# Altium PCB PCB.PcbDoc
Units mm, origin at the board's own origin, x right, y up, seen from the top; angles counter-clockwise.
Board outline 51.94 x 30.86 mm, 2 copper layers (Top Layer, Bottom Layer); 28 components, 49 nets, 159 pads, 29 vias.
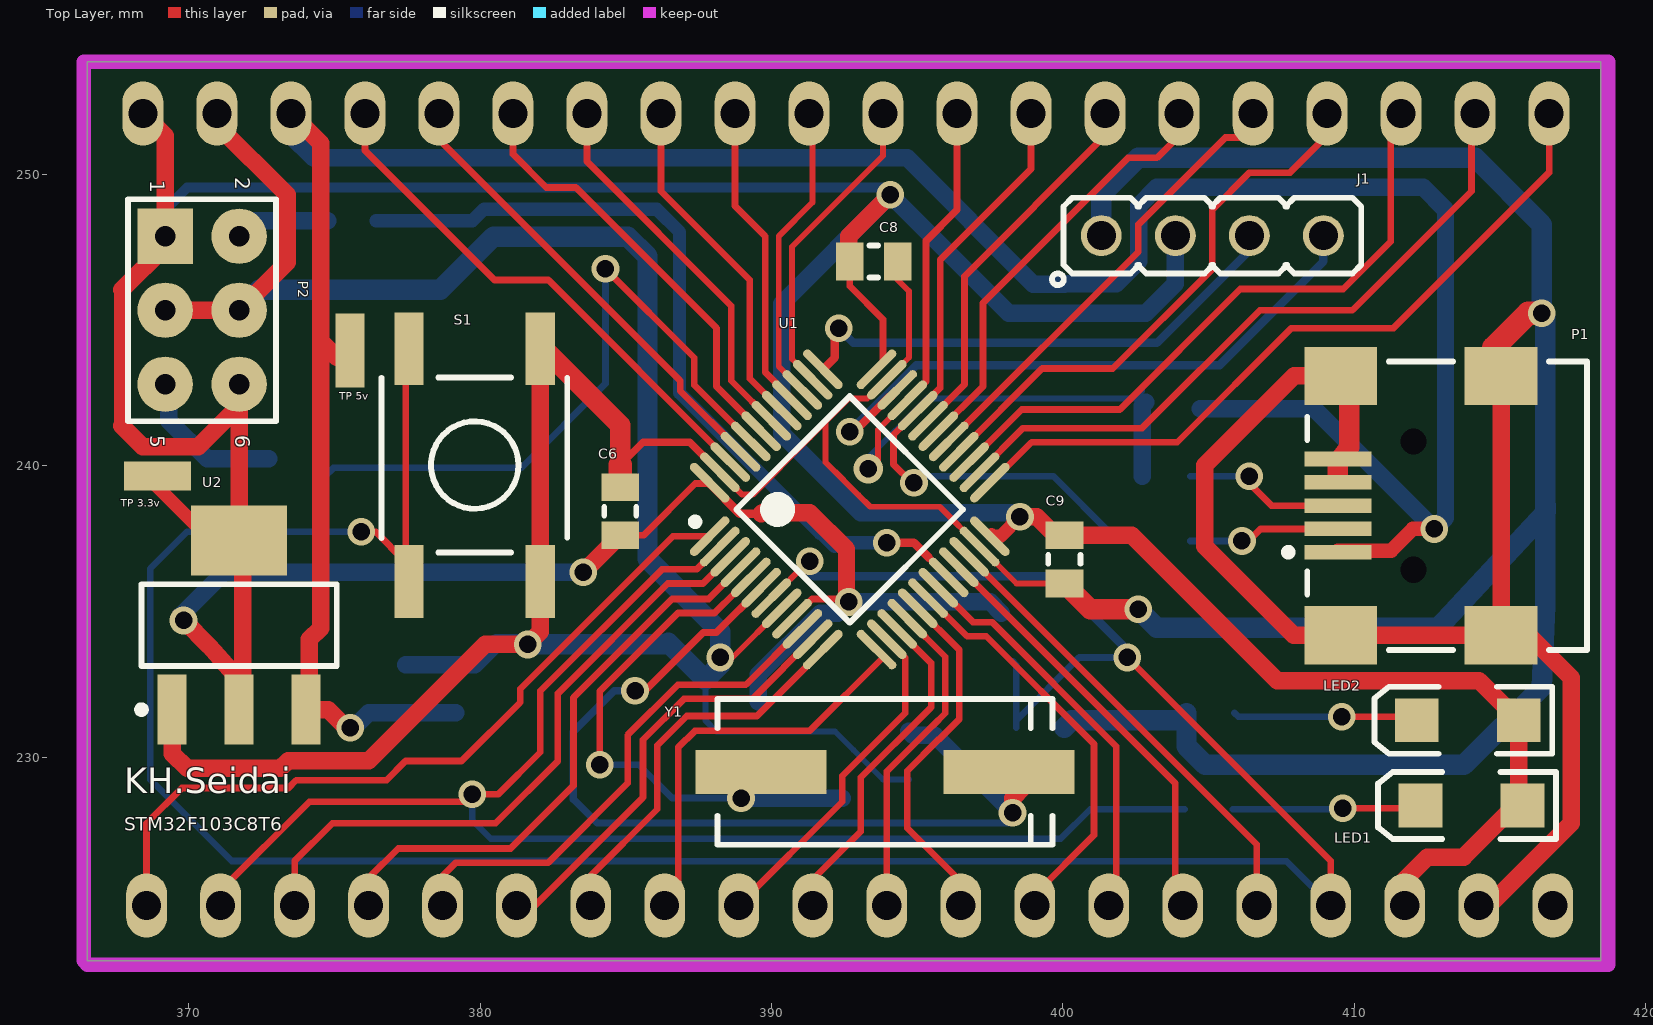
[diagram p0: Top Layer view]
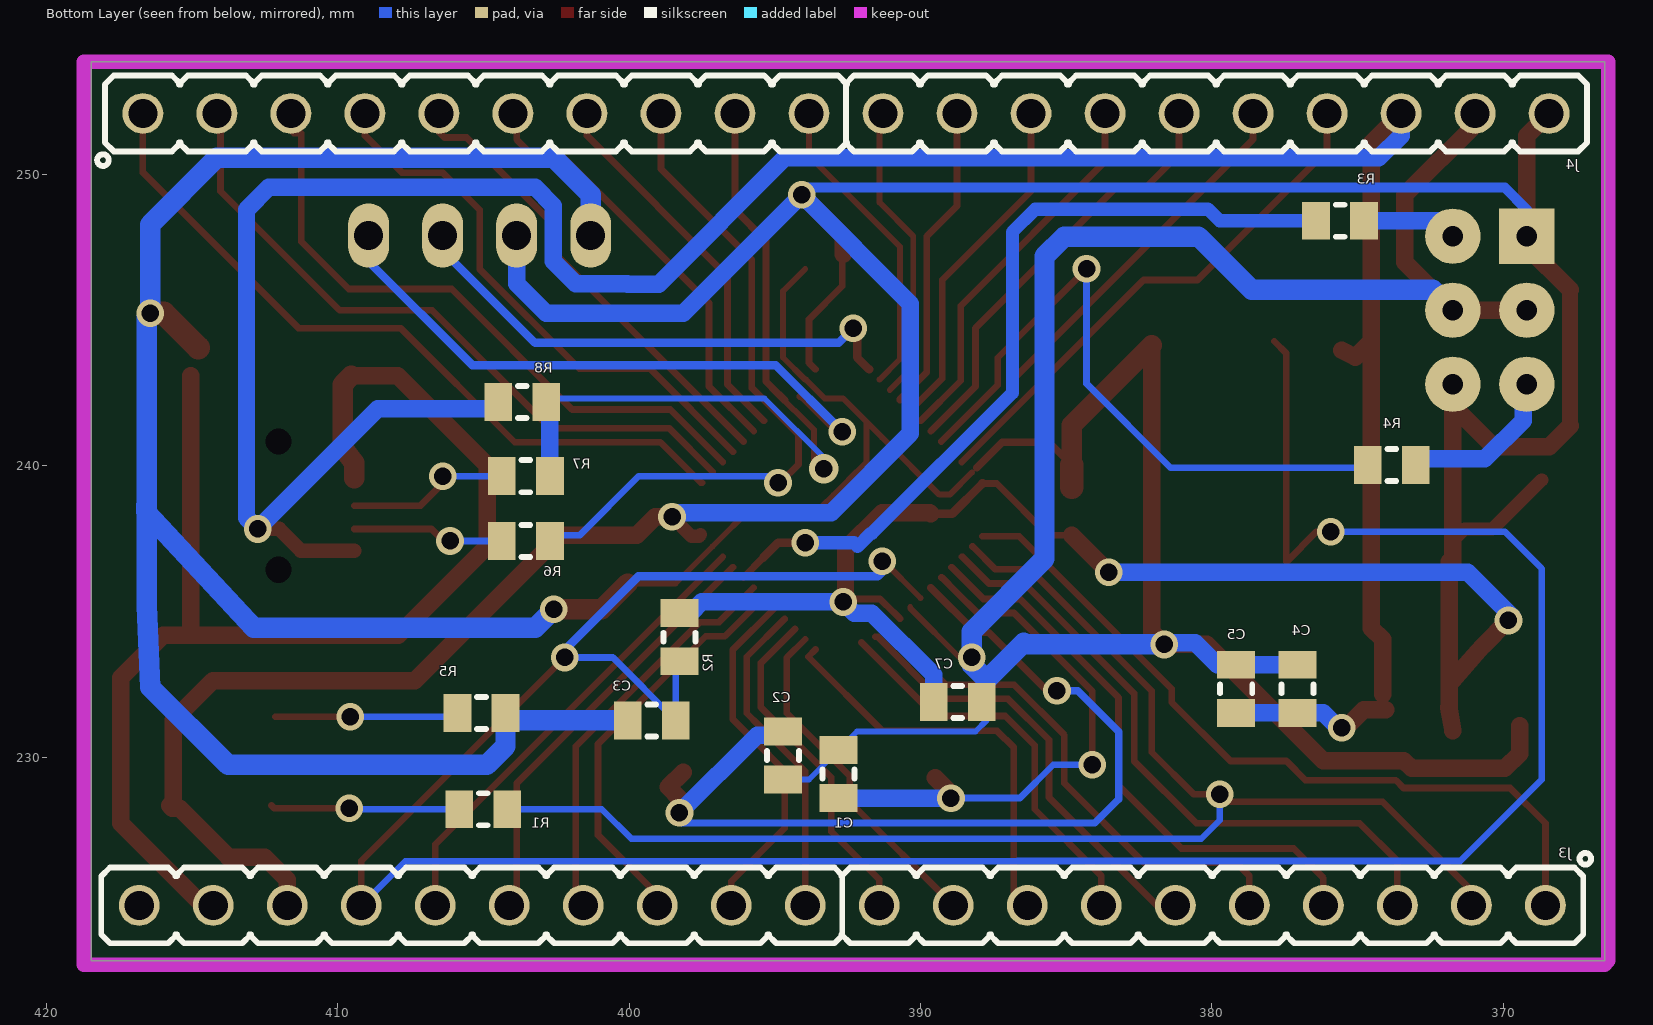
[diagram p1: Bottom Layer view, seen from below]

## Layer stack, top to bottom
Top Solder: solder mask 0.0102, Solder Resist, Dk 3.5
Top Layer: signal copper 0.0356
Dielectric 1: dielectric 0.32, FR-4, Dk 4.8
Bottom Layer: signal copper 0.0356
Bottom Solder: solder mask 0.0102, Solder Resist, Dk 3.5

## Board outline
366.522,223.012 418.465,223.012 418.465,253.873 366.522,253.873

## Design rules (kind name [scope] priority, off if disabled: settings)
Clearance Clearance_1 [InComponent('U1')] p1: gap=0.17 ignorepadtopadclearanceinfootprint=FALSE
Clearance [All] p2: gap=0.254 ignorepadtopadclearanceinfootprint=FALSE
PolygonConnect [All] p1: connectstyle=Relief reliefconductorwidth=0.254 reliefentries=4 polygonreliefangle="90 Angle" airgapwidth=0.254
RoutingVias [All] p1: holewidth=0.9 width=1.27 viastyle="Through Hole" minholewidth=0.6 minwidth=0.6 maxholewidth=1.5 maxwidth=2
SolderMaskExpansion [All] p1: expansion=0.102
UnRoutedNet [All] p1: checkbadconnections=TRUE
Width Width_1 [(InNet('3.3') OR InNet('5v') OR InNet('GND'))] p1: maxlimit=0.8 minlimit=0.1 preferedwidth=0.8
Width [All] p2: maxlimit=0.6 minlimit=0.1 preferedwidth=0.45
29 further rules are at their usual default settings.

## Components (designator, comment, footprint, x,y, rotation, side; value= is the part's Value field where it differs from the comment)
C1 "20pf" SMD_CAP_0805 392.811,230.251 r270 bottom
C2 "20pf" SMD_CAP_0805 394.716,229.236 r90 bottom
C3 "1uF" SMD_CAP_0805 398.4,231.267 r0 bottom
C4 "1uF" SMD_CAP_0805 377.063,231.522 r90 bottom
C5 "100nf" SMD_CAP_0805 379.167,231.522 r90 bottom
C6 "10uF" SMD_CAP_0805 384.81,237.618 r90 top
C7 "100nF" SMD_CAP_0805 389.549,231.902 r180 bottom
C8 "100nF" SMD_CAP_0805 392.684,247.015 r0 top
C9 "100nF" SMD_CAP_0805 400.05,237.616 r270 top
J1 "HDR1X4" HDR_M_1X4 405.13,247.904 r0 top value=HDRM4
J3 "HDR1X20" HDR_M_1X20 392.684,224.917 r0 bottom locked value=HDRM20
J4 "HDR1X20" HDR_M_1X20 392.557,252.095 r180 bottom locked value=HDRM20
LED1 "white" "LED SMD 1206" 414.02,228.346 r180 top
LED2 "Green" "LED SMD 1206" 413.893,231.272 r180 top
P1 "USB mini" "SMD_Mini USB Connector" 417.286,238.638 r0 top locked
P2 "Header 3X2" HDR2X3 369.189,247.883 r270 top
R1 "10K" "RES 0805 (2012X06L)" 405.83,228.219 r180 bottom
R2 "10K" "RES 0805 (2012X06L)" 398.272,233.3 r90 bottom
R3 "100K" "RES 0805 (2012X06L)" 374.777,248.412 r0 bottom
R4 "100K" "RES 0805 (2012X06L)" 374.65,240.03 r180 bottom
R5 "10K" "RES 0805 (2012X06L)" 405.892,231.521 r180 bottom
R6 "20ohm" "RES 0805 (2012X06L)" 402.718,237.424 r0 bottom
R7 "20ohm" "RES 0805 (2012X06L)" 402.717,239.649 r0 bottom
R8 "2.2K" "RES 0805 (2012X06L)" 404.494,242.189 r180 bottom
S1 "Switch PB" SW-PB 379.815,240.03 r270 top
U1 "STM32F103C8T6" LQFP48_N 392.684,238.506 r45 top locked
U2 "LM1117IMP-x.x" MP04A_N 371.729,234.536 r90 top
Y1 "8MHZ" "Crystal SMD" 394.462,229.496 r180 top

## Footprints (in the part's own frame and the unit in brackets; to place one, negate y for a bottom-side part, rotate by r counter-clockwise, add the part's x,y. Pads: shape width x height; smd on the part's side, far side on the other; paste and mask are expansions set on the pad)
"Crystal SMD" [mm]
  rect 4.5x1.5 smd: 1(-3.683,0) 2(4.817,0)
  silkscreen extent -5.18,-2.5 6.32,2.5, body extent -5.64,-2.25 6.66,2.25, height 5.18
HDR2X3 [mm] "Connector; Header; 3x2 Position"
  rect 1.9x1.9 hole 0.7: 1(0,0)
  round 1.9 hole 0.7: 2(0,2.54) 3(2.54,0) 4(2.54,2.54) 5(5.08,0) 6(5.08,2.54)
  silkscreen extent -1.27,-1.27 6.35,3.81
HDR_M_1X4 [mm] "Connector; Header; 4 Position"
  round 1.4 / inner round 1.4 / far side oval 1.4x2.2 hole 1 mask+0.1: 1(-3.81,0) 2(-1.27,0) 3(1.27,0) 4(3.81,0)
  silkscreen extent -5.5,-1.7 5.11,1.3, body extent -5.08,-1.27 5.08,1.27, height 8.54
HDR_M_1X20 [mm] "Connector; Header; 20 Position"
  round 1.4 / inner round 1.4 / far side oval 1.4x2.2 hole 1 mask+0.1: 1(-24.13,0) 2(-21.59,0) 3(-19.05,0) 4(-16.51,0) 5(-13.97,0) 6(-11.43,0) 7(-8.89,0) 8(-6.35,0) 9(-3.81,0) 10(-1.27,0) 11(1.27,0) 12(3.81,0) 13(6.35,0) 14(8.89,0) 15(11.43,0) 16(13.97,0) 17(16.51,0) 18(19.05,0) 19(21.59,0) 20(24.13,0)
  silkscreen extent -25.7,-1.8 25.43,1.3, body extent -25.4,-1.3 25.4,1.19, height 8.54
"LED SMD 1206" [mm]
  rect 1.5x1.5 smd: 1(-1.75,0) 2(1.75,0)
  silkscreen extent -2.9,-1.15 3.2,1.15, body extent -1.65,-0.76 1.65,0.69, height 1.36
LQFP48_N [mm] "Thin QFP, 48-Leads, Body 7x7mm, Pitch 0.5mm, IPC Medium Density"
  oval 1.8x0.3 smd: 1(-4.05,2.75) 2(-4.05,2.25) 3(-4.05,1.75) 4(-4.05,1.25) 5(-4.05,0.75) 6(-4.05,0.25) 7(-4.05,-0.25) 8(-4.05,-0.75) 9(-4.05,-1.25) 10(-4.05,-1.75) 11(-4.05,-2.25) 12(-4.05,-2.75) 25(4.05,-2.75) 26(4.05,-2.25) 27(4.05,-1.75) 28(4.05,-1.25) 29(4.05,-0.75) 30(4.05,-0.25) 31(4.05,0.25) 32(4.05,0.75) 33(4.05,1.25) 34(4.05,1.75) 35(4.05,2.25) 36(4.05,2.75)
  oval 0.3x1.8 smd: 13(-2.75,-4.05) 14(-2.25,-4.05) 15(-1.75,-4.05) 16(-1.25,-4.05) 17(-0.75,-4.05) 18(-0.25,-4.05) 19(0.25,-4.05) 20(0.75,-4.05) 21(1.25,-4.05) 22(1.75,-4.05) 23(2.25,-4.05) 24(2.75,-4.05) 37(2.75,4.05) 38(2.25,4.05) 39(1.75,4.05) 40(1.25,4.05) 41(0.75,4.05) 42(0.25,4.05) 43(-0.25,4.05) 44(-0.75,4.05) 45(-1.25,4.05) 46(-1.75,4.05) 47(-2.25,4.05) 48(-2.75,4.05)
  silkscreen extent -4.17,-2.75 2.75,3.57, body extent -3.5,-3.5 3.5,3.5, height 1.6
MP04A_N [mm] "SOT223, 4-Leads, Body 6.5x3.5mm, Pitch 2.3mm, Lead Span 7mm, IPC Medium Density"
  rect 2.4x1 smd: 1(-2.9,2.3) 2(-2.9,0) 3(-2.9,-2.3)
  rect 2.4x3.3 smd: 4(2.9,0)
  silkscreen extent -3.02,-3.35 1.4,3.47, body extent -3.49,-3.24 3.49,3.24, height 1.64
"RES 0805 (2012X06L)" [mm] "Chip Resistor, 2-Leads, Body 2.0x1.3mm, IPC High Density _ (0.100 W)"
  rect 0.95x1.3 smd: 1(0,0) 2(1.65,0)
  silkscreen extent 0.67,-0.55 0.98,0.55, body extent -0.19,-0.63 1.84,0.64, height 0.6
SMD_CAP_0805 [mm]
  rect 0.95x1.3 smd: 1(0,0) 2(1.65,0)
  silkscreen extent 0.67,-0.55 0.97,0.55, body extent -0.19,-0.64 1.84,0.63, height 0.65
"SMD_Mini USB Connector" [mm]
  rect 2.3x0.5 smd: 1(-7.85,-1.6) 2(-7.85,-0.8) 3(-7.85,0) 4(-7.85,0.8) 5(-7.85,1.6)
  rect 2.5x2 smd: 6(-7.75,4.45) 7(-2.25,4.45) 8(-7.75,-4.45) 9(-2.25,-4.45)
  round 0.6 hole 0.9 unplated: MH1(-5.25,2.2) MH2(-5.25,-2.2)
  silkscreen extent -9.67,-4.95 0.7,4.95, body extent -8.6,-5.64 40.34,5.16, height 5.8
SW-PB [mm]
  rect 2.5x1 smd: 1(-3.992,2.25) 1(3.992,2.25) 2(-3.992,-2.25) 2(3.992,-2.25)
  silkscreen extent -3,-3.2 3,3.18, body extent -4.5,-3 4.5,3, height 5

## Part data
C1 C2 C3 C4 C5 C6 C7 C8 C9: library part Cap-Bipolar, "Bipolar Capacitor", Voltage=100V, Adding Date=1387/12/20, Designer="Saeid Jorablo", Organazation=ControTec
J1: library part HDR_M_1X4, "CONN, HEADER, Male, pitch: 2.54mm, 4POS", =http://www.chila.ir
J3 J4: library part HDR_M_1X20, "CONN, HEADER, Male, pitch: 2.54mm, 20POS", =http://www.chila.ir
LED1 LED2: library part LED, "LED", Adding Date=1387/12/22, Designer="Saeid Jorablo", Organazation=ControTec, Size="SMD 1206"
  LED1: Color=white
  LED2: Color=Green
P1: "mini USB Connector"
P2: "Header, 3-Pin, Dual row", LatestRevisionDate=17-Jul-2002, LatestRevisionNote="Re-released for DXP Platform.", Publisher="Altium Limited"
R1 R5: library part Resistor, "Resistor", Power="1/8 W", Tolerance=5%
R2: library part Resistor, "Resistor"
R3 R4 R6 R7 R8: library part Resistor, "Resistor", Power="1/8 W"
S1: "Push Button Switch"
U1: "STM32 ARM-based 32-bit MCU with 64 Kbytes Flash, 48-pin LQFP, Industrial Temperature", ComponentLink1Description="Manufacturer Link", ComponentLink1URL=www.st.com/stm32, ComponentLink2Description=Datasheet, ComponentLink2URL=http://www.st.com/stonline/products/literature/ds/13587.pdf, DatasheetVersion="rev6, Mar-2008", PackageDescription="48-Pin Low-Profile Quad Flat Pack, 7 x 7 mm Body, 0.5 mm Pitch (LQFP48)", PackageReference=LQFP48, PackageVersion=Mar-2008, Published=30-May-2008, Publisher="Altium Limited"
U2: "x.x Volt, 800mA Low-Dropout Linear Regulator, 4-pin SOT-223", Manufacturer="National Semiconductor", PackageTopMarking=XYTT*N05B, PartNumber=LM1117IMP-3.3, PowerWise=N, Supplier Part Number 1=7614123, Code_IPC=SOT223-4, Code_JEDEC=TO-261-AA, ComponentLink1Description="LM1117 Datasheet", ComponentLink1URL=http://www.national.com/ds/LM/LM1117.pdf, ComponentLink2Description="LM1117 Web Page", ComponentLink2URL=http://www.national.com/pf/LM/LM1117.html, ComponentLink3Description="MP04A Package Page", ComponentLink3URL=http://www.national.com/packaging/folders/mp04a.html, CompType="LDO IC", DatasheetVersion=Apr-2006, PackageDescription="Molded SOT-223, 6.50 x 3.56 x 1.6mm Body, 4 Lead, 2.3mm Pitch", PackageReference=MP04A, PackageVersion="revB, Apr-2003", PinCount=4, Published=4-Dec-2008, Publisher="Altium Limited", RoHS=N, Supplier 1=Farnell
Y1: library part XTAL, "XTAL Crystal", Company=E.P.I.L, Design Date=11/04/2011

## Free pads (board coordinates)
  rect 1x2.54 smd: 2(375.539,243.967)
  rect 2.3x1 smd: 3(368.935,239.649)

## Via types
v1: diameter 0.95, hole 0.6, Top Layer to Bottom Layer, 28 vias
v2: diameter 1, hole 0.6, Top Layer to Bottom Layer, 1 vias

## Nets (pads, with @x,y where several pads share a name; then routed paths per layer and width w, separated by ;. In a path a pad name is that pad's centre, name@x,y a point inside that pad or via, vN(x,y) a via of type N, cw(c..) or ccw(c..) an arc to the next point about the centre after c; other vN are vias at no path point)
3.3: C6.1 C7.1 C8.1 C9.1 J1.2 J3.18 J4.20 LED1.1 LED2.1 P2.1 P2.6 pad.3 R2.2 U1.9 U1.24 U1.36 U1.48 U2.2 U2.4 | length 171.4
  Top Layer w0.23: C6.1 385.606,237.618 387.383,239.395 U1.48@387.873,239.395 ; U1.9 391.174,235.228 391.184,235.228 391.39,235.434 v1@392.477,235.434 ; C8.1 392.684,246.174 393.827,245.031 393.827,243.538 U1.36
  Top Layer w0.3: U1.48@387.873,239.395 388.908,238.36 389.654,238.36
  Top Layer w0.45: pad.3@368.681,239.522 370.365,237.838 371.327,237.838 U2.4 ; U1.24@397.548,237.643 397.604,237.587 397.861,237.587 v1(398.526,238.252)
  Top Layer w0.55: 367.707,241.385 367.707,246.041
  Top Layer w0.6: 367.707,241.385 368.427,240.665 370.332,240.665 P2.6@371.729,242.062 ; 367.707,246.041 369.189,247.523 P2.1 369.189,251.333 J4.20 ; v1(369.824,234.696) 370.713,233.807 U2.2@371.856,232.514 ; U2.2@371.729,230.907 371.852,231.615 U2.2@371.856,231.636 ; U2.4@371.729,236.707 U2.4 P2.6@371.729,242.062 ; P2.6 P2.6@371.729,242.062 ; U2.4@371.847,236.71 371.856,236.314 U2.2@371.856,232.514 ; v1(383.54,236.348) C6.1 ; 389.654,238.36 389.686,238.392 391.318,238.392 392.574,237.136 392.574,235.411 v1(392.655,235.331) ; C8.1@392.655,247.269 392.655,247.875 v1(394.081,249.301) ; v1(398.526,238.252) 399.106,238.252 399.742,237.616 C9.1 402.369,237.616 407.351,232.634 414.281,232.634 LED2.1 415.643,228.473 LED1.1 415.671,228.247 415.414,228.247 413.751,226.583 413.763,226.571 412.499,226.571 411.734,225.806 J3.18 ; U2.2@371.856,231.636 U2.2@371.856,231.73 ; U2.2@371.856,231.636 371.87,231.715 U2.2@371.856,231.73 ; U2.2@371.856,231.73 U2.2@371.856,232.514
  Bottom Layer w0.35: P2.1 369.189,248.793 369.951,249.555 v1@393.827,249.555
  Bottom Layer w0.6: v1(369.824,234.696) 369.697,234.823 371.222,236.348 v1(383.54,236.348) ; C7.1 389.549,232.831 391.668,234.95 392.274,234.95 v1(392.655,235.331) 397.51,235.331 R2.2@397.891,234.95 ; v1(398.526,238.252) 398.386,238.392 393.071,238.392 390.351,241.112 390.351,245.571 v1(394.081,249.301) 398.145,245.237 402.844,245.237 403.86,246.253 J1.2
5v: C4.1 C5.1 J4.18 P1.1 pad.2 R8.1 U2.3 | length 97.2
  Top Layer w0.5: P1.1@409.436,237.084 411.261,237.084 412.015,237.838 v1(412.75,237.838)
  Top Layer w0.6: J4.18 374.523,251.079 374.523,244.276 ; U2.3 374.788,231.636 375.411,231.013 v1(375.539,231.013) ; U2.3@374.142,232.156 374.142,234.052 374.523,234.433 374.523,244.276 ; pad.2 375.074,243.726 374.523,244.276
  Bottom Layer w0.6: J4.18 373.507,251.333 374.269,250.571 374.523,250.571 394.654,250.571 398.984,246.241 400.055,246.241 400.064,246.25 401.839,246.25 402.606,247.017 402.606,248.934 403.23,249.558 412.366,249.558 413.131,248.793 413.131,238.219 v1(412.75,237.838) 408.625,241.963 R8.1@404.721,241.963 ; v1(375.539,231.013) 375.667,231.013 376.176,231.522 C4.1 C5.1
Bat: J3.1 U1.1 | length 26.5
  Top Layer w0.23: J3.1 368.554,227.735 369.766,228.947 373.424,228.947 373.688,229.211 376.785,229.211 377.444,229.87 379.364,229.87 381.379,231.885 381.379,232.343 386.623,237.587 U1.1
BOOT0: R4.1 U1.44 | length 22.9
  Top Layer w0.23: v1(384.302,246.761) 387.35,243.713 387.35,242.779 U1.44
  Bottom Layer w0.23: R4.1@374.65,239.619 374.964,239.933 381.411,239.933 384.302,242.824 v1(384.302,246.761)
BOOT1: R3.2 U1.20 | length 28.4
  Top Layer w0.25: 395.396,236.855 U1.20
  Top Layer w0.29: v1(393.954,237.363) 394.888,237.363 395.396,236.855
  Bottom Layer w0.45: R3.2 379.73,248.412 380.128,248.81 386.063,248.81 386.842,248.031 386.842,242.512 391.672,237.682 391.711,237.682 392.16,237.233 392.29,237.363 v1(393.954,237.363)
GND: C1.1 C2.1 C3.2 C4.2 C5.2 C6.2 C7.2 C8.2 C9.2 J1.1 J3.19 J4.19 P1.4 P1.5 P1.6 P1.7 P1.8 P1.9 P2.3 P2.4 R5.2 S1.1 U1.8 U1.23 U1.35 U1.47 U2.1 | length 243.9
  Top Layer w0.2: U1.47 388.994,239.014 389.353,239.014 391.308,240.969 ; v1(388.239,233.426) v1@388.457,233.426 ; v1@388.493,233.462 v1@388.457,233.426 ; U1.8@390.351,235.157 U1.8 388.627,233.388 388.589,233.426 v1@388.457,233.426 ; 391.316,240.978 391.855,241.516 ; C8.2@393.953,246.761 394.716,245.998 394.716,243.72 U1.35 393.93,242.961 393.285,242.316 392.655,242.316 391.855,241.516 ; C9.2 398.406,235.966 U1.23 395.776,238.596 393.386,238.596 392.981,239.002 392.977,239.002 392.477,239.502 392.477,239.505 391.855,240.127 391.855,241.516
  Top Layer w0.254: 384.81,240.03 385.592,240.812 387.196,240.812 U1.47@388.075,239.933
  Top Layer w0.6: P2.3 P2.4 373.38,246.994 373.38,249.301 370.967,251.714 J4.19 ; U2.1@369.443,231.085 369.443,230.124 369.951,229.616 373.146,229.616 373.41,229.88 376.184,229.88 380.178,233.874 v1(381.635,233.874) 382.065,234.304 382.065,236.038 382.065,244.022 S1.1@382.065,244.136 ; P1.6 407.934,243.088 404.876,240.03 404.876,237.236 407.924,234.188 P1.8 P1.9 ; J3.19 414.624,224.917 417.449,227.742 417.449,232.729 415.99,234.188 P1.9 ; P1.7 P1.9
  Top Layer w0.7: S1.1@382.065,244.136 384.81,241.391 384.81,240.03 ; C9.2 400.939,235.077 v1(402.59,235.077) ; P1.4@409.436,239.579 409.436,240.111 409.497,240.192 409.829,240.631 409.829,242.795 P1.6
  Top Layer w0.8: C6.2 384.81,240.03 ; P1.7@414.782,244.052 415.967,245.237 v1(416.433,245.237)
  Bottom Layer w0.2: 387.731,232.664 387.731,231.268 388.114,230.885 392.177,230.885 C1.1 393.826,229.236 C2.1
  Bottom Layer w0.6: C4.2@377.444,233.172 C5.2 379.815,233.172 380.577,233.934 381.575,233.934 v1(381.635,233.874)
  Bottom Layer w0.7: P2.4@371.877,245.491 372.427,246.041 378.629,246.041 380.458,247.87 385.064,247.87 385.745,247.189 385.745,236.809 388.239,234.315 v1(388.239,233.426) 388.239,233.172 387.731,232.664 386.461,233.934 386.401,233.874 v1(381.635,233.874) ; C3.2@400.049,231.013 400.303,231.267 403.988,231.267 R5.2 404.242,230.378 404.878,229.742 413.765,229.742 416.433,232.41 416.56,235.204 416.56,238.408 ; J1.1 401.32,249.301 402.59,250.571 414.147,250.571 416.433,248.285 v1(416.433,245.237) 416.56,245.11 416.56,239.002 ; v1(402.59,235.077) 403.225,234.442 412.877,234.442 416.56,238.408 ; 416.56,238.408 416.56,239.002 ; 416.56,238.408 416.581,238.431 416.56,239.002
NetLED1_2: LED1.2 R1.1 | length 6.5
  Top Layer w0.23: v1(409.603,228.247) 412.171,228.247 LED1.2
  Bottom Layer w0.23: R1.1 409.575,228.219 v1(409.603,228.247)
NetLED2_2: LED2.2 R5.1 | length 6.3
  Top Layer w0.23: v1(409.575,231.394) LED2.2@412.143,231.394
  Bottom Layer w0.23: R5.1 406.019,231.394 v1(409.575,231.394)
NetP1_2: P1.2 R6.2 | length 5.2
  Top Layer w0.23: v1(406.146,237.424) 406.367,237.424 406.781,237.838 P1.2
  Bottom Layer w0.23: R6.2 v1(406.146,237.424)
NetP1_3: P1.3 R7.2 | length 5.6
  Top Layer w0.23: v1(406.4,239.649) 406.4,239.395 407.157,238.638 P1.3
  Bottom Layer w0.23: R7.2 v1(406.4,239.649)
NetP2_2: P2.2 R3.1 | length 3.3
  Bottom Layer w0.6: P2.2 372.258,248.412 R3.1
NetP2_5: P2.5 R4.2 | length 5.3
  Bottom Layer w0.6: P2.5 369.316,242.676 369.316,241.554 370.632,240.238 R4.2@372.745,240.238
"OSC in": C1.2 U1.5 Y1.2 | length 19.3
  Top Layer w0.23: v1@384.231,229.616 v1(384.104,229.743) 384.104,232.262 386.791,234.95 388.045,234.95 388.755,235.66 389.267,236.173 U1.5
  Top Layer w0.6: v1(388.954,228.6) 388.874,228.68 Y1.2@389.493,229.3
  Bottom Layer w0.23: v1(384.104,229.743) 385.445,229.743 386.588,228.6 v1(388.954,228.6)
  Bottom Layer w0.6: v1(388.954,228.6) C1.2@392.43,228.6
"OSC out": C2.2 U1.6 Y1.1 | length 33.1
  Top Layer w0.254: v1(385.318,232.283) 385.659,232.283 387.658,234.282 388.106,234.282 U1.6
  Top Layer w0.6: Y1.1@398.145,229.489 398.653,228.981 398.272,228.6 v1(398.272,228.092)
  Bottom Layer w0.254: v1(385.318,232.283) 384.604,232.283 383.192,230.871 383.192,228.567 384.015,227.744 389.356,227.744 389.357,227.745 398.179,227.745 398.399,227.965 v1(398.272,228.092)
  Bottom Layer w0.6: C2.2 394.843,230.759 395.605,230.759 v1(398.272,228.092)
PA0: J3.5 U1.10 | length 17.8
  Top Layer w0.23: J3.5 378.714,225.933 379.167,226.386 382.342,226.386 385.064,229.108 385.064,230.759 386.794,232.489 389.119,232.489 391.035,234.405 U1.10
PA1: J3.6 U1.11 | length 15.3
  Top Layer w0.23: J3.6 381.882,224.917 385.592,228.627 385.592,230.602 386.994,232.005 389.342,232.005 391.477,234.139 U1.11@391.542,234.139
PA2: J3.7 U1.12 | length 13.8
  Top Layer w0.23: J3.7 383.794,225.933 386.08,228.219 386.08,230.406 387.09,231.416 389.503,231.416 U1.12@392.026,233.939
PA3: J3.8 U1.13 | length 14.3
  Top Layer w0.23: J3.8 386.798,225.381 386.798,230.334 387.371,230.907 391.308,230.907 393.851,233.45 U1.13
PA4: J3.9 U1.14 | length 11.8
  Top Layer w0.23: J3.9 392.43,228.473 392.43,229.358 394.589,231.517 394.589,233.419 U1.14
PA5: J3.10 U1.15 | length 11.7
  Top Layer w0.23: J3.10 391.414,225.806 393.065,227.457 393.065,229.309 395.332,231.576 395.341,231.576 395.478,231.713 395.478,233.237 U1.15
PA6: J3.11 U1.16 | length 11.2
  Top Layer w0.23: J3.11 393.954,229.513 395.533,231.092 395.542,231.092 395.962,231.512 395.962,233.45 394.664,234.748 U1.16
PA7: J3.12 U1.17 | length 12.3
  Top Layer w0.23: U1.17 396.446,233.683 396.446,231.312 395.742,230.608 395.733,230.608 394.664,229.539 394.664,227.566 396.494,225.736 J3.12
PA8: J4.5 U1.29 | length 16
  Top Layer w0.23: U1.29 402.59,247.351 402.59,248.285 405.575,251.269 406.337,251.269 406.527,251.46 J4.5
PA9: J4.6 U1.30 | length 14.7
  Top Layer w0.23: U1.30 397.256,242.724 397.256,245.589 402.238,250.571 403.225,250.571 403.86,251.206 J4.6@403.86,251.968
PA10: J4.7 U1.31 | length 13.1
  Top Layer w0.23: U1.31 396.621,242.797 396.621,246.507 401.447,251.333 J4.7
PA11: J4.8 R6.1 U1.32 | length 24.4
  Top Layer w0.23: v1(394.888,239.425) 394.813,239.425 394.188,240.05 394.188,241.071 U1.32 395.789,242.672 395.789,247.072 398.907,250.19 J4.8
  Bottom Layer w0.23: v1(394.888,239.425) 394.813,239.425 394.598,239.64 399.66,239.64 399.669,239.649 401.701,237.617 402.525,237.617 R6.1
PA12: J4.9 R7.1 R8.2 U1.33 | length 27
  Top Layer w0.2: v2(393.319,239.903) 393.367,239.856 393.653,240.142 393.653,241.243 394.321,241.911 394.339,241.911 394.664,242.236 U1.33
  Top Layer w0.23: U1.33@395.097,242.687 395.305,242.895 395.305,247.731
  Top Layer w0.254: U1.33 U1.33@395.097,242.687 ; 395.305,247.731 396.367,248.793 J4.9
  Bottom Layer w0.2: v2(393.319,239.903) 393.319,240.03 393.192,240.157 395.351,242.316 402.463,242.316 R8.2@402.717,242.57
  Bottom Layer w0.6: R7.1 402.717,242.062 R8.2
PA15: J4.10 U1.38 | length 11.1
  Top Layer w0.2: U1.38 390.704,243.668 390.704,247.523 393.827,250.646 J4.10
  Top Layer w0.29: J4.10 J4.10@394.081,251.841
PB0: J3.13 U1.18 | length 14.2
  Top Layer w0.23: U1.18 395.394,235.465 395.524,235.335 395.533,235.335 396.714,234.153 397.368,234.153 401.066,230.456 401.066,227.33 399.034,225.298 J3.13
PB1: J3.14 U1.19 | length 13.9
  Top Layer w0.23: U1.19 395.733,235.819 396.915,234.637 397.569,234.637 401.828,230.378 401.828,225.171 J3.14
PB3: J4.11 U1.39 | length 10.4
  Top Layer w0.2: U1.39 390.25,243.415 390.25,247.883 391.411,249.044 391.411,251.971 J4.11
PB4: J4.12 U1.40 | length 10.7
  Top Layer w0.23: J4.12 388.747,248.92 389.781,247.886 389.781,243.221 390.704,242.298 U1.40
PB5: J4.13 U1.41 | length 11.9
  Top Layer w0.23: J4.13 386.207,249.428 389.255,246.38 389.255,242.996 U1.41
PB6: J4.14 U1.42 | length 13.2
  Top Layer w0.23: J4.14 383.667,250.444 388.62,245.491 388.62,242.924 U1.42
PB7: J4.15 U1.43 | length 15
  Top Layer w0.23: J4.15 381.127,250.698 382.27,249.555 383.286,249.555 388.112,244.729 388.112,242.724 U1.43
PB8: J4.16 U1.45 | length 15.9
  Top Layer w0.23: J4.16 378.587,251.206 386.866,242.927 386.866,242.579 388.936,240.509 U1.45
PB9: J4.17 U1.46 | length 18.2
  Top Layer w0.23: J4.17 376.047,250.825 380.492,246.38 382.341,246.38 388.583,240.138 U1.46
PB10: J3.15 U1.21 | length 14.8
  Top Layer w0.23: U1.21 403.86,229.098 403.86,225.171 J3.15
PB11: J3.16 U1.22 | length 16.1
  Top Layer w0.23: U1.22 406.654,227.011 J3.16
PB12: J4.1 U1.25 | length 25.6
  Top Layer w0.23: U1.25 397.54,239.425 398.927,240.812 403.925,240.812 407.842,244.729 411.353,244.729 416.687,250.063 J4.1
PB13: J4.2 U1.26 | length 23.6
  Top Layer w0.23: U1.26 397.139,239.801 398.633,241.296 402.713,241.296 406.76,245.343 409.935,245.343 414.02,249.428 414.02,251.968 J4.2
PB14: J4.3 U1.27 | length 22.5
  Top Layer w0.23: U1.27 398.588,241.935 401.955,241.935 406.088,246.068 409.62,246.068 411.252,247.7 411.252,251.42 411.501,251.42 411.216,251.704 J4.3
PB15: J4.4 U1.28 | length 19.1
  Top Layer w0.23: U1.28 399.288,243.342 401.711,243.342 405.13,246.761 405.13,248.793 406.4,250.063 407.797,250.063 409.067,251.333 J4.4
PC13: J3.2 R1.2 U1.2 | length 49.8
  Top Layer w0.23: J3.2 371.094,225.425 374.142,228.473 379.476,228.473 v1(379.73,228.727) 380.619,228.727 382.065,230.173 382.065,232.277 386.238,236.45 387.423,236.45 388.207,237.233 U1.2
  Bottom Layer w0.23: v1(379.73,228.727) 379.73,227.838 380.365,227.203 399.923,227.203 400.939,228.219 R1.2
PC14: J3.3 U1.3 | length 22.2
  Top Layer w0.23: J3.3 373.634,226.441 374.928,227.735 380.526,227.735 382.667,229.876 382.667,232.194 386.438,235.966 387.646,235.966 388.56,236.88 U1.3
PC15: J3.4 U1.4 | length 19.9
  Top Layer w0.23: J3.4 376.174,225.854 377.19,226.87 381.048,226.87 383.204,229.026 383.204,232.047 386.591,235.434 387.844,235.434 U1.4
RESET: C3.1 J3.17 R2.1 S1.2 U1.7 | length 100
  Top Layer w0.2: U1.7 391.26,236.728 v1(391.316,236.728)
  Top Layer w0.23: v1(375.92,237.744) 376.409,237.744 377.444,236.709 377.444,243.859 S1.2@377.861,244.276 ; v1(402.209,233.426) 409.194,226.441 J3.17
  Bottom Layer w0.23: v1(375.92,237.744) 369.951,237.744 368.681,236.474 368.681,229.235 371.475,226.441 386.66,226.441 386.67,226.431 407.68,226.431 J3.17 ; R2.1 398.4,233.172 C3.1 400.558,233.426 v1(402.209,233.426) ; C3.1@398.399,231.013 C3.1@398.399,231.394
  Bottom Layer w0.3: v1(391.316,236.728) 391.316,236.398 391.301,236.382 391.473,236.21 399.679,236.21 402.209,233.68 v1(402.209,233.426)
SWDCLK: J1.3 U1.37 | length 18
  Top Layer w0.29: U1.37 392.176,243.726 392.176,244.856 v1(392.303,244.729)
  Bottom Layer w0.29: v1(392.303,244.729) 392.811,244.221 403.225,244.221 406.4,247.396 J1.3
SWDIO: J1.4 U1.34 | length 21.7
  Top Layer w0.23: U1.34@394.054,242.379 U1.34@394.144,242.379
  Top Layer w0.29: v1(392.684,241.173) 392.783,241.173 392.905,241.296 392.938,241.263 U1.34@394.054,242.379
  Bottom Layer w0.29: v1@392.561,241.296 v1(392.684,241.173) 394.97,243.459 405.382,243.459 408.94,247.017 J1.4
pads on no net: J3.20 P1.MH1 P1.MH2

## Keep-outs
Keep-Out Layer:
  lines w0.5: 366.395,223.012 366.522,222.885 418.719,222.885 418.719,253.873 366.395,253.873 366.395,250.571 366.395,223.012

## Silkscreen, mask and mechanical layers (free items; w line width, h text height)
Top Overlay:
  text "TP 5v" at 375.158,242.189 h0.45
  text "TP 3.3v" at 367.665,238.506 h0.45
  text "KH.Seidai" at 367.792,228.473 h1.5
  text "STM32F103C8T6" at 367.792,227.33 h0.8

## Text inside footprints (layer, text, board x,y; h text height)
P1: Mechanical 1 "PCB Edge" at 417.718,234.602 h0.25 r90
P2: Top Overlay "1" at 368.681,249.809 h0.5 r270; Top Overlay "2" at 371.602,249.915 h0.5 r270; Top Overlay "5" at 368.681,241.046 h0.5 r270; Top Overlay "6" at 371.602,241.046 h0.5 r270